# EAGLE board Inverter New_no_connec (EAGLE 9.1.2), part 1 of 2
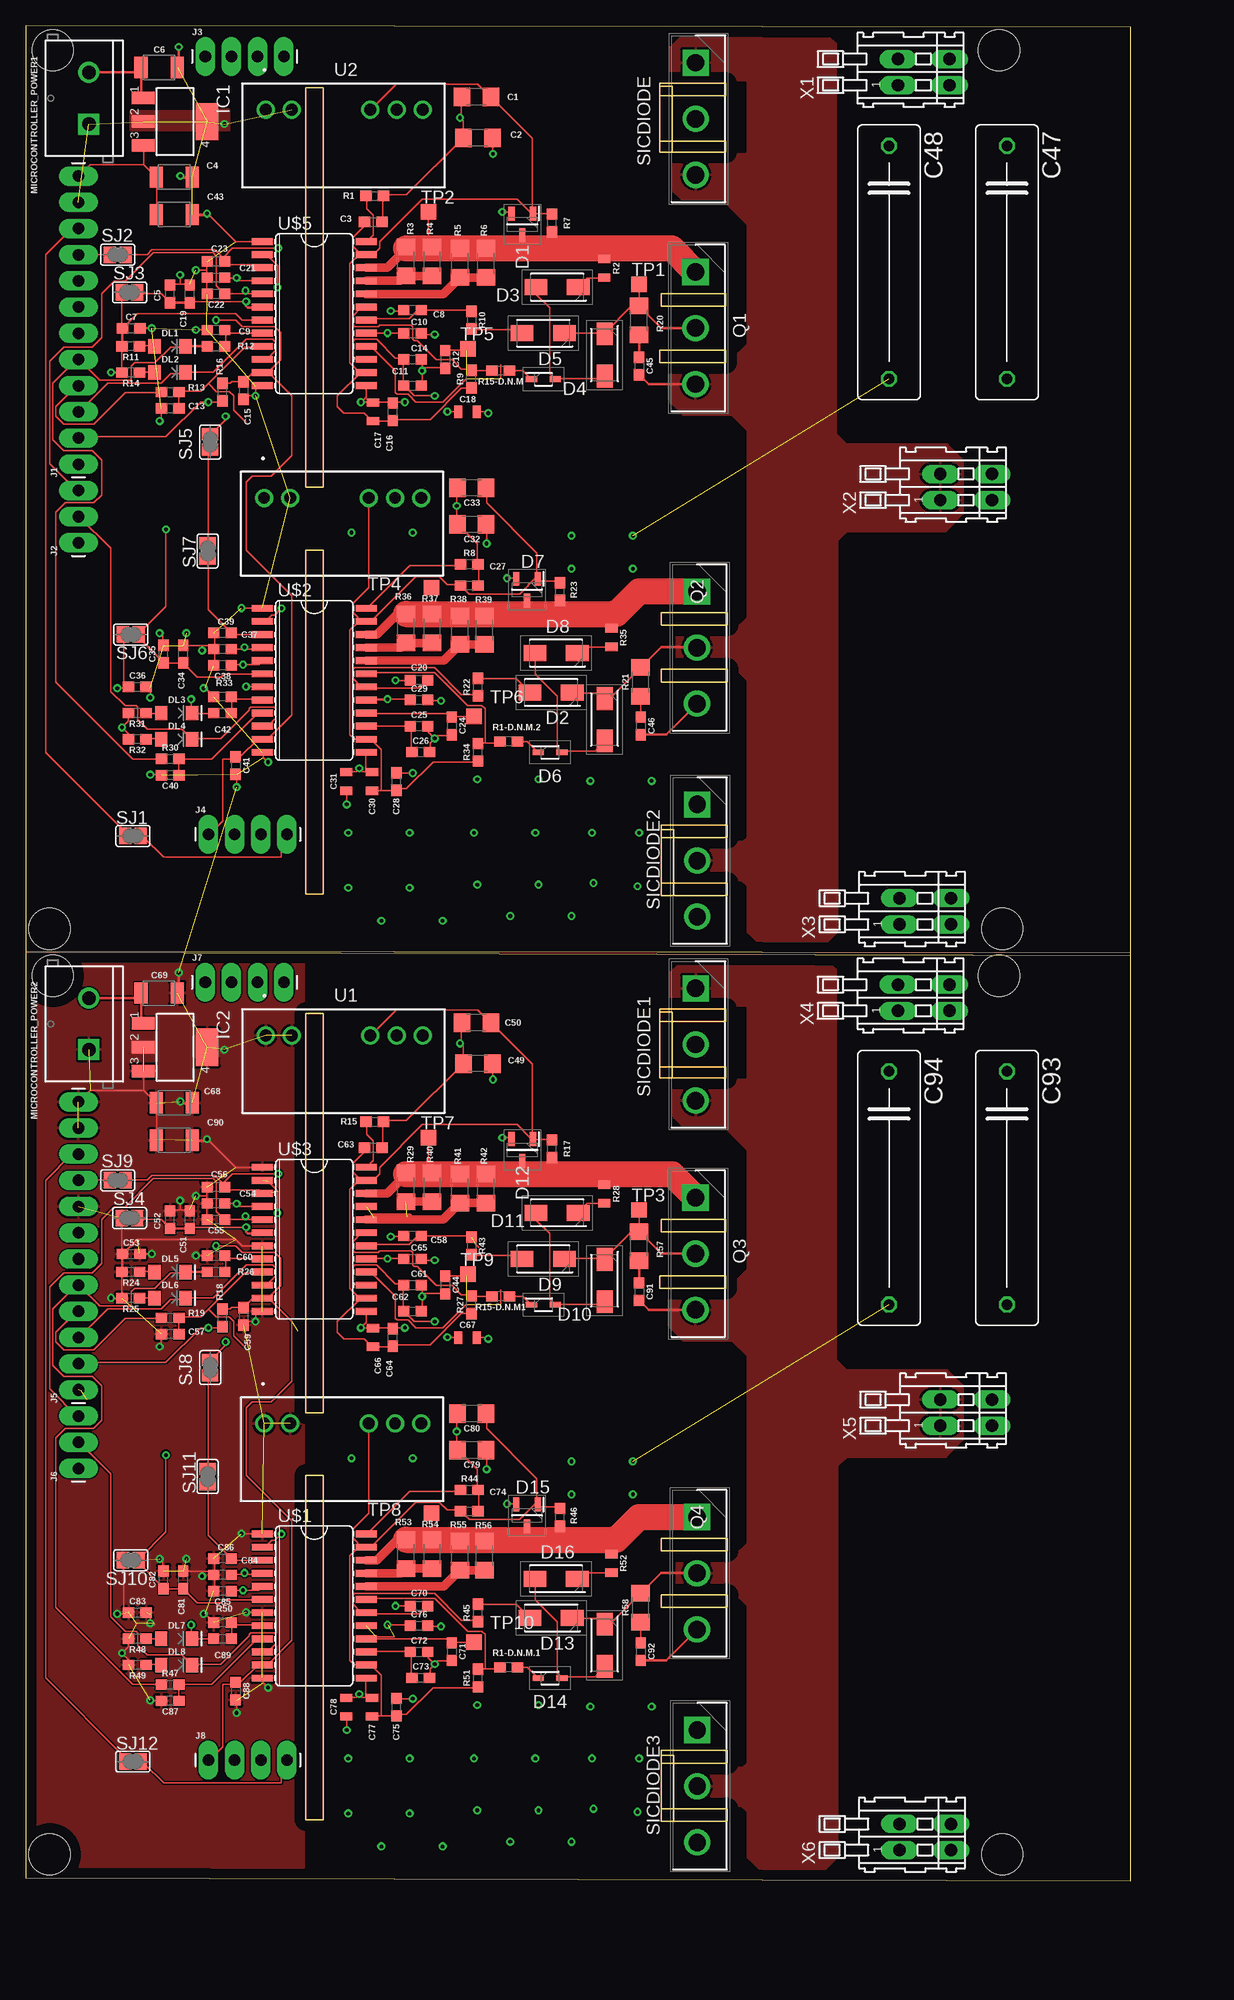
[diagram p0: board, top side]
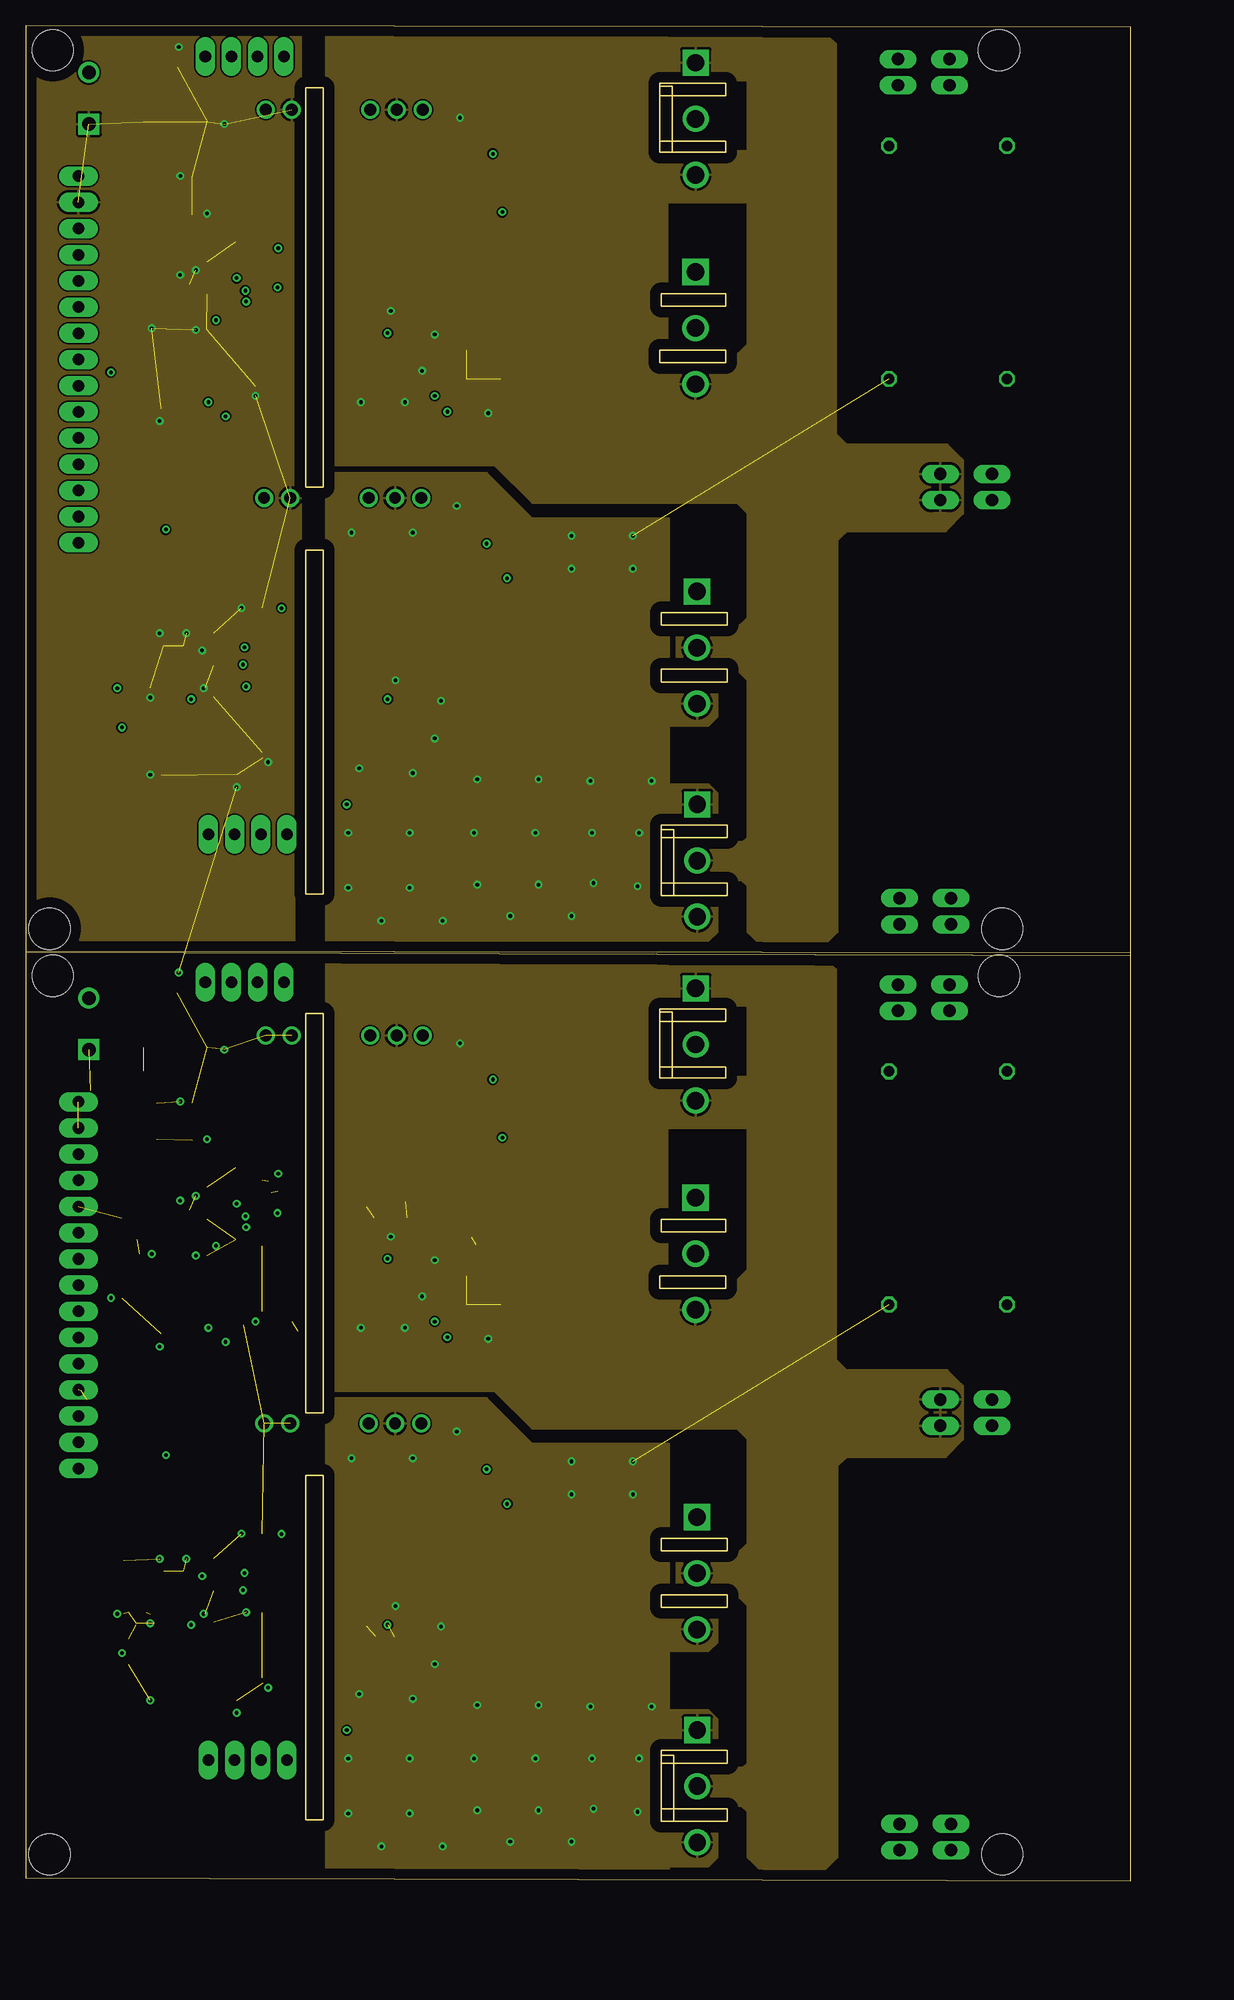
[diagram p1: board, inner layer Route2]
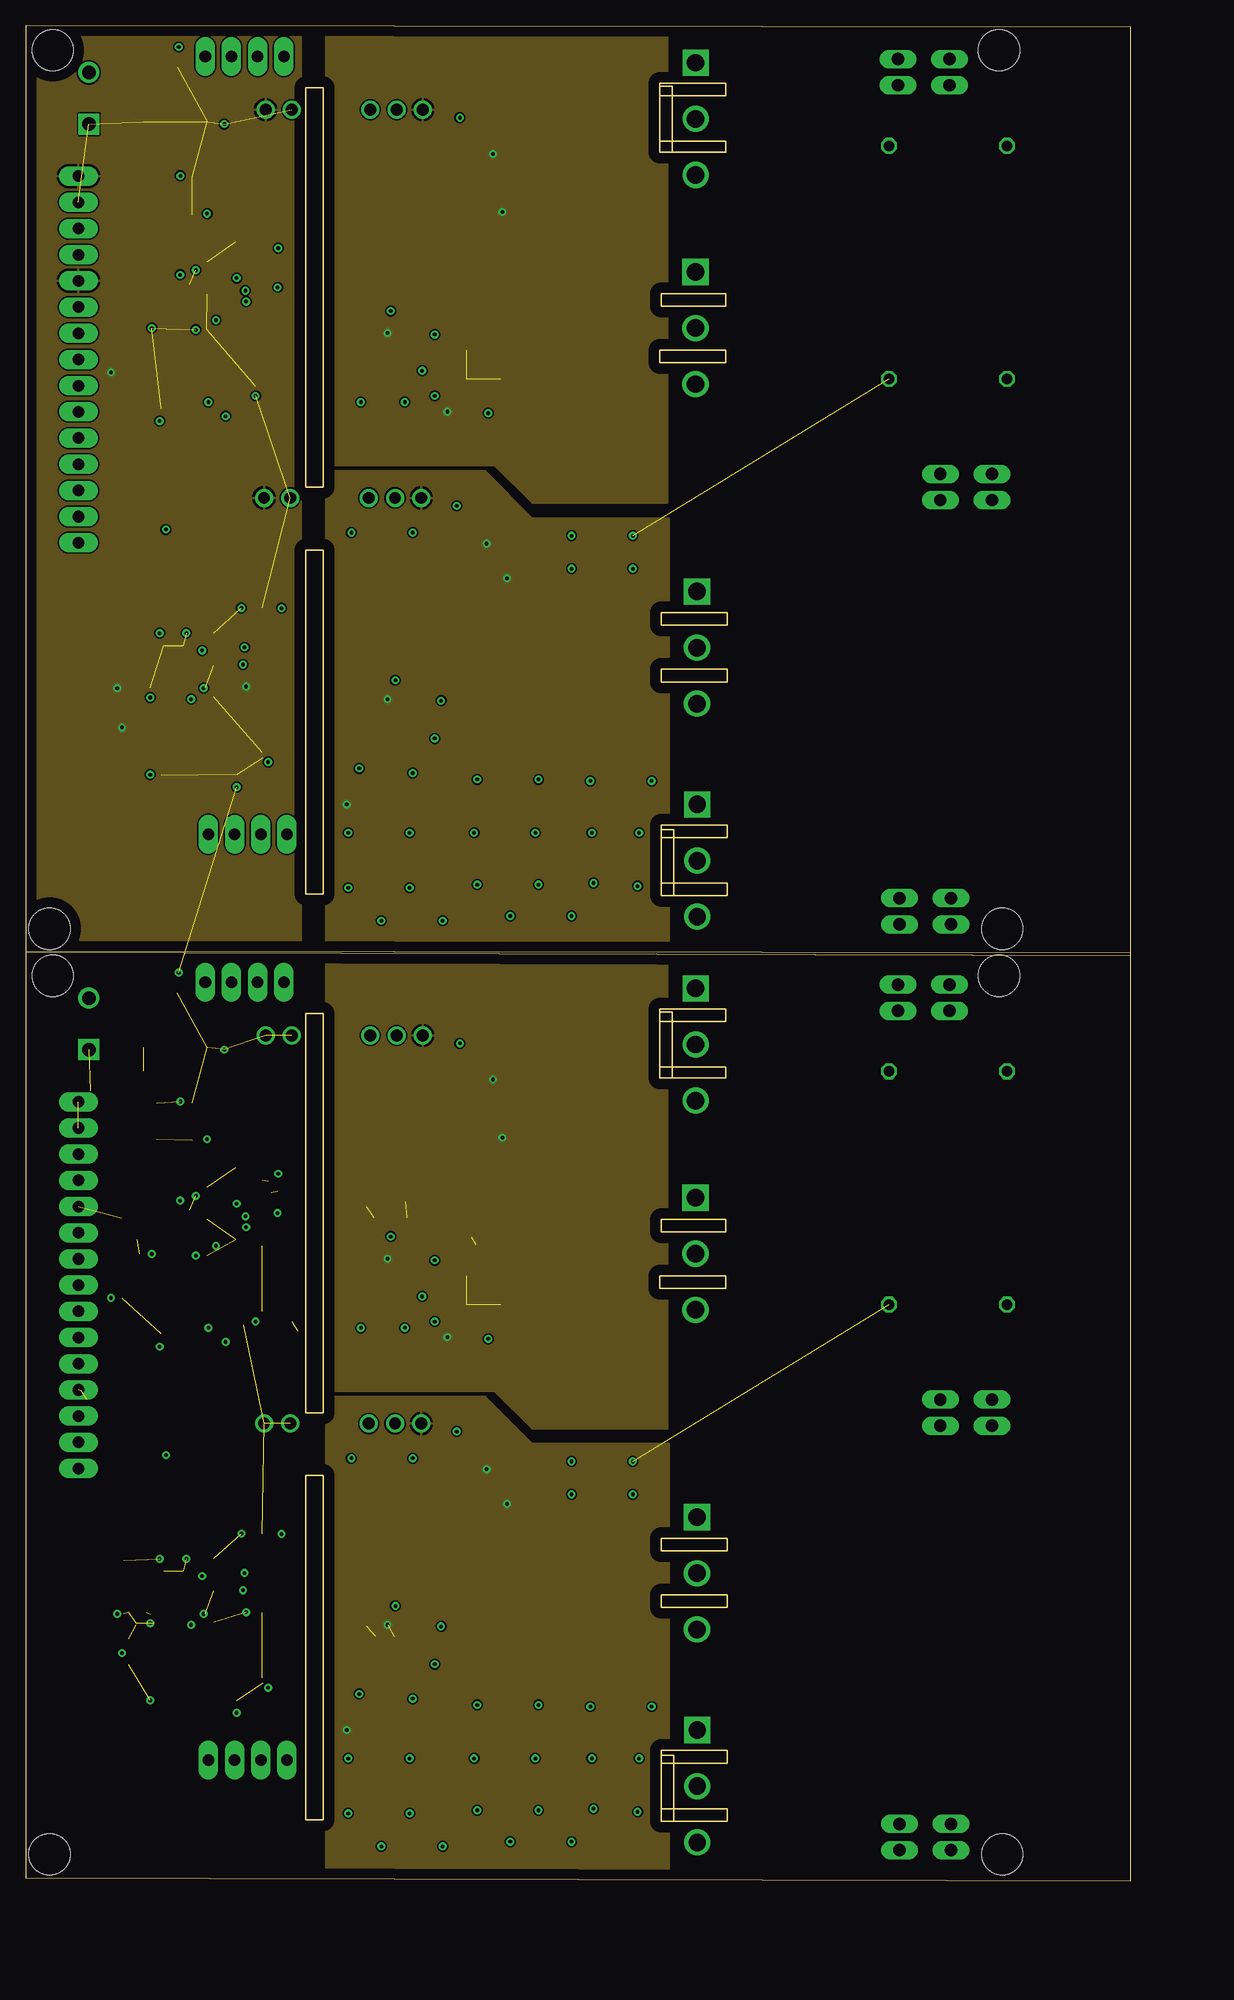
[diagram p2: board, inner layer Route15]
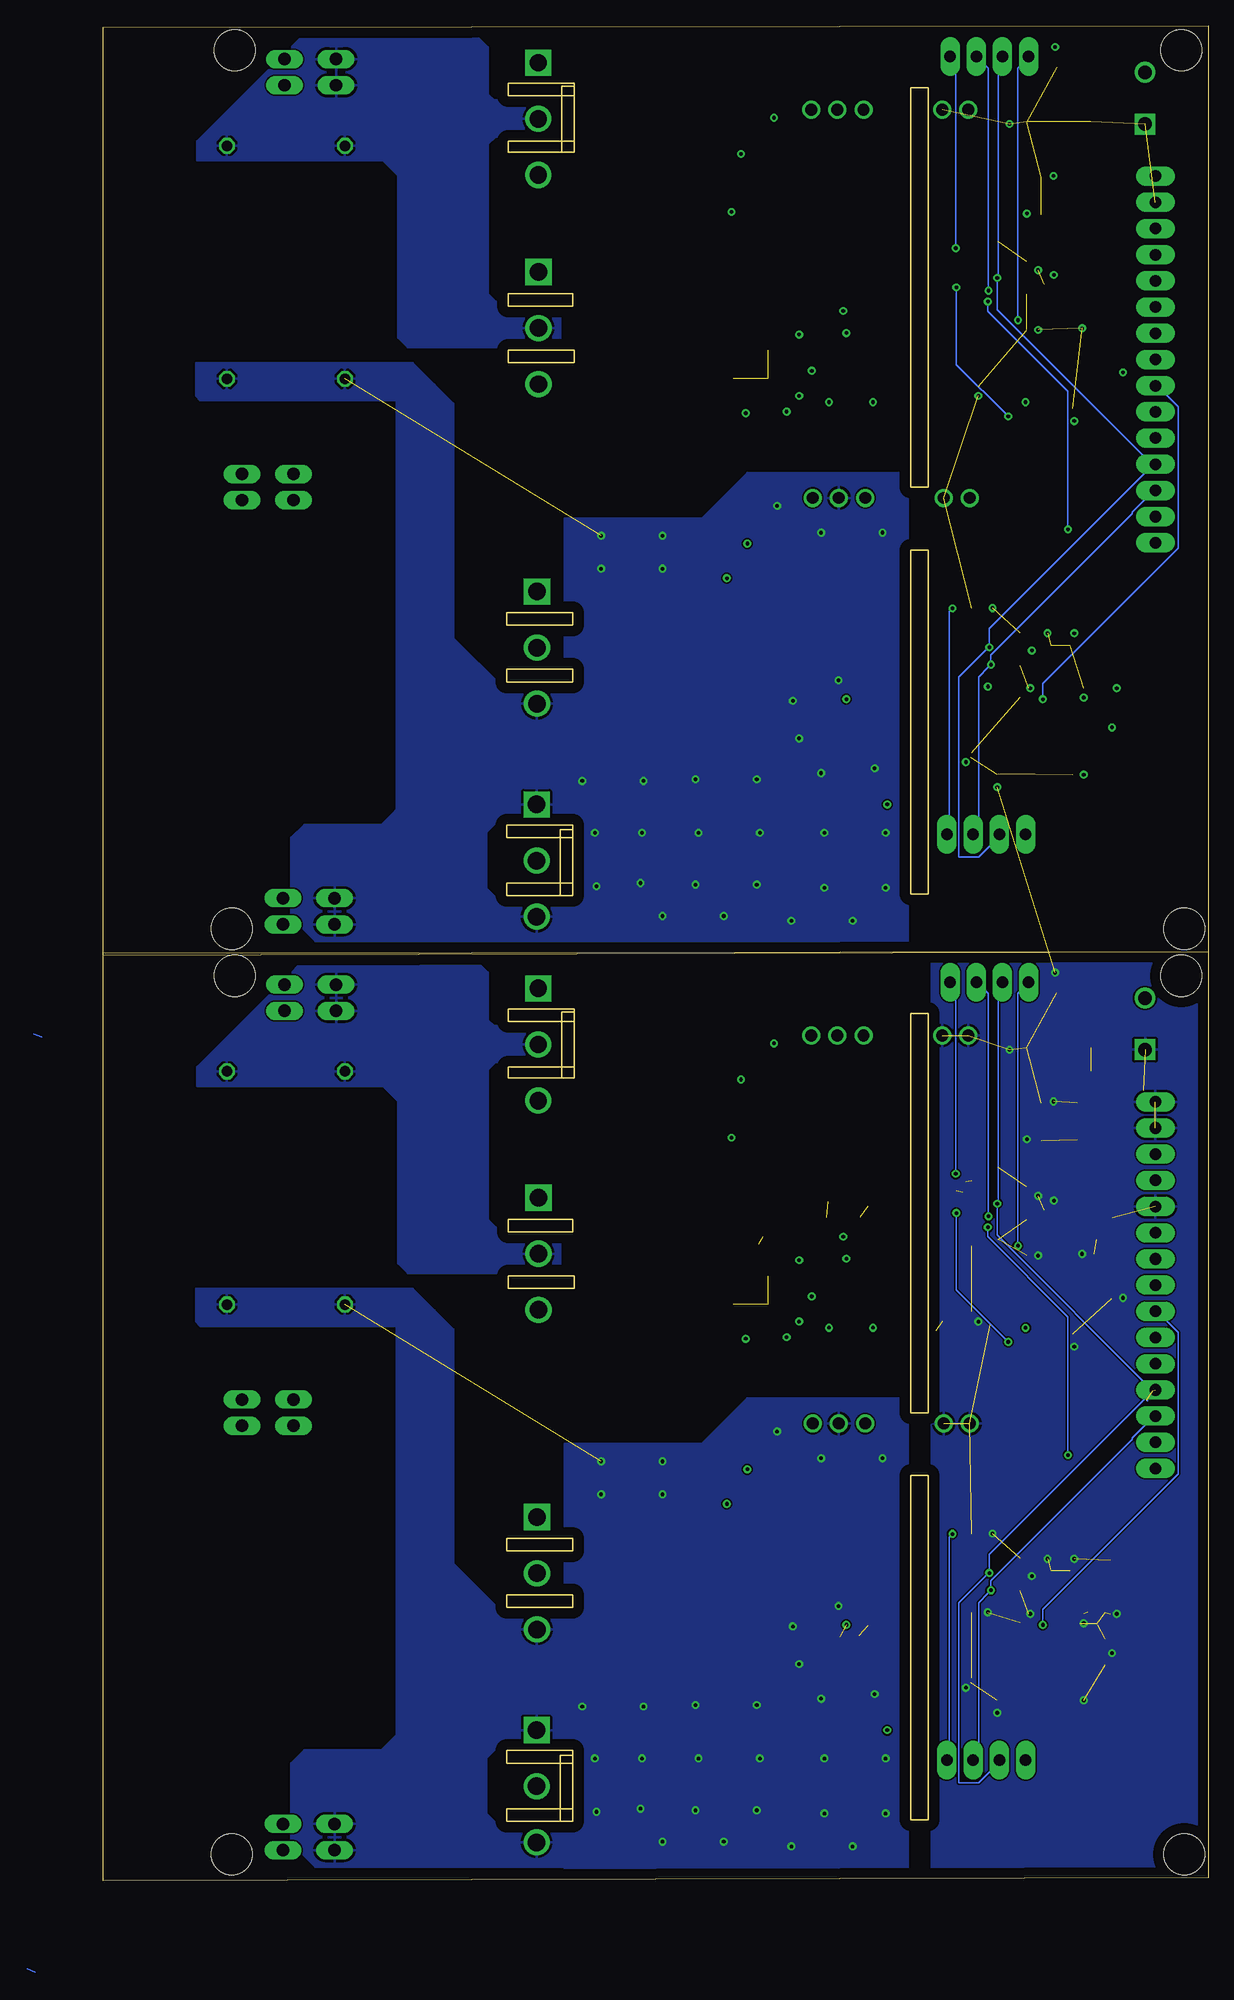
[diagram p3: board, bottom side, seen from below]

Size 107.12 x 179.91 mm. Coordinates in mm from the lower left corner, seen from the top.
Outline: 0,90.07 107.12,89.76 107.12,179.76 0,179.91 0,90.07
Outline: 0,0.3 107.12,0 107.12,89.99 0,90.14 0,0.3
Copper layers (1*2+15*16): Top 0.035mm / dielectric 1.15mm / Route2 0.035mm / dielectric 0.15mm / Route15 0.035mm / dielectric 0.2mm / Bottom 0.035mm
Design rules "default *": minimum track width 6mil, minimum drill 0.35mm, track to track 6mil, track to pad 6mil, pad to pad 6mil, via to via 6mil, smd to smd 6mil, copper to edge 40mil, drill to drill 6mil, minimum pad ring 10mil, minimum via ring 8mil, stop-mask expansion 4mil, vias tented up to drill 0mil, thermal gap 10mil
Net classes: 0 default: width 0.1 mm, drill 0.2 mm, clearance 0.003 mm
Holes 4 mm at 94.67,92.35 94.36,177.55 2.62,177.55 2.31,92.35 94.67,2.59 94.36,87.78 2.62,87.78 2.31,2.59

## Footprints (pad centres in the part's own frame; a part is rotated, then mirrored left to right if it is on the bottom)
SPARKFUN-CAPACITORS_1206 = smd 1.6 x 1.8: 1 -1.4,0; 2 1.4,0
SPARKFUN-CAPACITORS_0603 = smd 1.1 x 1: 1 -0.85,0; 2 0.85,0
SPARKFUN-CAPACITORS_1210 = smd 1.27 x 2.06: 1 -1.755,0; 2 1.755,0
SPARKFUN-CAPACITORS_0805 = smd 0.8 x 1.2: 1 -0.9,0; 2 0.9,0
C225-062X268 = drill 1.016 octagon: 1 -11.303,0; 2 11.303,0
BAT54SFILM_SOT105P242X150-3N = smd 1.35 x 0.6: 1 -1.05,1.05; 2 -1.05,-1.05; 3 1.05,0
STTH112A_DIOM5126X265N = smd 2.2 x 1.55: 1 -2.05,0; 2 2.05,0
STPS2H100A_DIOM5126X265N = smd 2.2 x 1.55: 1 -2.05,0; 2 2.05,0
BAT20JFILM_SOD2512X113N = smd 1.11 x 0.55: 1 -1.14,0; 2 1.14,0
SPARKFUN-LED_LED-1206 = smd 1.2 x 1.4: A -1.5,0; C 1.5,0
NATIONAL-SEMICONDUCTOR_SOT223 = smd 1.219 x 2.235: 1 -2.311,-3.099; 2 0,-3.099; 3 2.311,-3.099 | smd 3.6 x 2.2: 4 0,3.099
SPARKFUN-CONNECTORS_1X12_LONGPADS = drill 1.118 pad 1.88 long: 1 0,0; 2 2.54,0; 3 5.08,0; 4 7.62,0; 5 10.16,0; 6 12.7,0; 7 15.24,0; 8 17.78,0; 9 20.32,0; 10 22.86,0; 11 25.4,0; 12 27.94,0
SPARKFUN-CONNECTORS_1X03_LONGPADS = drill 1.118 pad 1.88 long: 1 0,0; 2 2.54,0; 3 5.08,0
SPARKFUN-CONNECTORS_1X04_LONGPADS = drill 1.118 pad 1.88 long: 1 0,0; 2 2.54,0; 3 5.08,0; 4 7.62,0
SPARKFUN-CONNECTORS_SCREWTERMINAL-5MM-2 = drill 1.3 pad 2.032 square: 1 0,0 | drill 1.3 pad 2.032: 2 5,0
C2M0280120D_TO544P521X1594X2550-3P = drill 1.69 pad 2.535 square: 1 0,0 | drill 1.69 pad 2.535: 2 5.44,0; 3 10.88,0
SPARKFUN-RESISTORS_0603 = smd 1.1 x 1: 1 -0.85,0; 2 0.85,0
SPARKFUN-RESISTORS_0805 = smd 0.8 x 1.2: 1 -0.9,0; 2 0.9,0
SPARKFUN-RESISTORS_1206 = smd 1.6 x 1.8: 1 -1.4,0; 2 1.4,0
JUMPER_SJ = smd 1.168 x 1.6: 1 -0.762,0; 2 0.762,0
TP15SQ = smd 1.5 x 1.5: TP 0,0
SAMACSYS_LIB_MGJ2D_7-PIN-SIP = drill 1.15 pad 1.75: 1 2.27,-2.53; 2 4.81,-2.53; 5 12.43,-2.53; 6 14.97,-2.53; 7 17.51,-2.53
SO24E-IC_SO24W = smd 0.66 x 2.032: 1 -4.445,-3.759; 2 -3.175,-3.759; 3 -1.905,-3.759; 4 -0.635,-3.759; 5 0.635,-3.759; 6 1.905,-3.759; 7 3.175,-3.759; 8 4.445,-3.759; 9 5.715,-3.759; 10 6.985,-3.759; 11 8.255,-3.759; 12 9.525,-3.759; 13 9.525,6.299; 14 8.255,6.299; 15 6.985,6.299; 16 5.715,6.299; 17 4.445,6.299; 18 3.175,6.299; 19 1.905,6.299; 20 0.635,6.299; 21 -0.635,6.299; 22 -1.905,6.299; 23 -3.175,6.299; 24 -4.445,6.299
234-502 = drill 1.2 long: A1 -1.27,2.5; A2 1.27,2.5; B1 -1.27,-2.5; B2 1.27,-2.5

## Placement (x,y rotation side)
C1  2.2uF  [SPARKFUN-CAPACITORS_1206]  43.69,173 180 top
C2  2.2uF  [SPARKFUN-CAPACITORS_1206]  43.84,169.04 180 top
C3  0.1uF  [SPARKFUN-CAPACITORS_0603]  33.68,160.88 0 top
C4  10uF  [SPARKFUN-CAPACITORS_1210]  14.4,165.23 0 top
C5  0.1uF  [SPARKFUN-CAPACITORS_0603]  14,153.9 90 top
C6  10uF  [SPARKFUN-CAPACITORS_1210]  12.93,175.87 0 top
C7  0.1uF  [SPARKFUN-CAPACITORS_0603]  10.21,150.57 0 top
C8  100pF  [SPARKFUN-CAPACITORS_0603]  37.49,152.32 180 top
C9  100pF  [SPARKFUN-CAPACITORS_0603]  18.44,150.39 180 top
C10  0.1uF  [SPARKFUN-CAPACITORS_0603]  37.49,150.09 0 top
C11  0.1uF  [SPARKFUN-CAPACITORS_0603]  37.49,145.01 0 top
C12  1nF  [SPARKFUN-CAPACITORS_0603]  40.67,147.55 270 top
C13  100pF  [SPARKFUN-CAPACITORS_0603]  14,142.8 180 top
C14  4.7uF  [SPARKFUN-CAPACITORS_0603]  37.49,147.55 0 top
C15  100pF  [SPARKFUN-CAPACITORS_0603]  21.11,144.53 270 top
C16  0.1uF  [SPARKFUN-CAPACITORS_0603]  35.59,142.47 90 top
C17  1.0uF  [SPARKFUN-CAPACITORS_0805]  33.68,142.47 90 top
C18  1.0uF  [SPARKFUN-CAPACITORS_0805]  42.82,142.47 0 top
C19  4.7uF  [SPARKFUN-CAPACITORS_0603]  15.9,153.9 90 top
C20  100pF  [SPARKFUN-CAPACITORS_0603]  38.13,116.43 180 top
C21  47pF  [SPARKFUN-CAPACITORS_0603]  18.44,155.47 180 top
C22  47pF  [SPARKFUN-CAPACITORS_0603]  18.44,153.9 180 top
C23  47pF  [SPARKFUN-CAPACITORS_0603]  18.44,157.05 180 top
C24  1nF  [SPARKFUN-CAPACITORS_0603]  41.3,112.01 270 top
C25  4.7uF  [SPARKFUN-CAPACITORS_0603]  38.13,111.99 0 top
C26  0.1uF  [SPARKFUN-CAPACITORS_0603]  38.28,109.47 0 top
C27  0.1uF  [SPARKFUN-CAPACITORS_0603]  43,125.63 0 top
C28  0.1uF  [SPARKFUN-CAPACITORS_0603]  35.94,106.63 90 top
C29  0.1uF  [SPARKFUN-CAPACITORS_0603]  38.13,114.53 0 top
C30  1.0uF  [SPARKFUN-CAPACITORS_0805]  33.58,106.63 90 top
C31  1.0uF  [SPARKFUN-CAPACITORS_0805]  31.06,106.63 90 top
C32  2.2uF  [SPARKFUN-CAPACITORS_1206]  43.23,131.55 180 top
C33  2.2uF  [SPARKFUN-CAPACITORS_1206]  43.23,135.08 180 top
C34  4.7uF  [SPARKFUN-CAPACITORS_0603]  15.27,118.97 90 top
C35  0.1uF  [SPARKFUN-CAPACITORS_0603]  13.36,118.97 90 top
C36  0.1uF  [SPARKFUN-CAPACITORS_0603]  10.82,115.8 0 top
C37  47pF  [SPARKFUN-CAPACITORS_0603]  19.08,119.46 180 top
C38  47pF  [SPARKFUN-CAPACITORS_0603]  19.08,117.88 180 top
C39  47pF  [SPARKFUN-CAPACITORS_0603]  19.08,121.03 180 top
C40  100pF  [SPARKFUN-CAPACITORS_0603]  14,107.24 180 top
C41  100pF  [SPARKFUN-CAPACITORS_0603]  20.35,108.18 270 top
C42  100pF  [SPARKFUN-CAPACITORS_0603]  19.08,114.83 180 top
C43  10uF  [SPARKFUN-CAPACITORS_1210]  14.4,161.59 0 top
C44  1nF  [SPARKFUN-CAPACITORS_0603]  40.67,57.79 270 top
C45  100pF  [SPARKFUN-CAPACITORS_0603]  59.46,146.91 270 top
C46  100pF  [SPARKFUN-CAPACITORS_0603]  59.61,112.01 270 top
C47  [C225-062X268]  95.12,156.97 270 top
C48  [C225-062X268]  83.69,156.97 270 top
C49  2.2uF  [SPARKFUN-CAPACITORS_1206]  43.84,79.27 180 top
C50  2.2uF  [SPARKFUN-CAPACITORS_1206]  43.69,83.24 180 top
C51  4.7uF  [SPARKFUN-CAPACITORS_0603]  15.9,64.14 90 top
C52  0.1uF  [SPARKFUN-CAPACITORS_0603]  14,64.14 90 top
C53  0.1uF  [SPARKFUN-CAPACITORS_0603]  10.21,60.81 0 top
C54  47pF  [SPARKFUN-CAPACITORS_0603]  18.44,65.71 180 top
C55  47pF  [SPARKFUN-CAPACITORS_0603]  18.44,64.14 180 top
C56  47pF  [SPARKFUN-CAPACITORS_0603]  18.44,67.28 180 top
C57  100pF  [SPARKFUN-CAPACITORS_0603]  14,53.04 180 top
C58  100pF  [SPARKFUN-CAPACITORS_0603]  37.49,62.56 180 top
C59  100pF  [SPARKFUN-CAPACITORS_0603]  21.11,54.76 270 top
C60  100pF  [SPARKFUN-CAPACITORS_0603]  18.44,60.63 180 top
C61  4.7uF  [SPARKFUN-CAPACITORS_0603]  37.49,57.79 0 top
C62  0.1uF  [SPARKFUN-CAPACITORS_0603]  37.49,55.25 0 top
C63  0.1uF  [SPARKFUN-CAPACITORS_0603]  33.68,71.12 0 top
C64  0.1uF  [SPARKFUN-CAPACITORS_0603]  35.59,52.71 90 top
C65  0.1uF  [SPARKFUN-CAPACITORS_0603]  37.49,60.33 0 top
C66  1.0uF  [SPARKFUN-CAPACITORS_0805]  33.68,52.71 90 top
C67  1.0uF  [SPARKFUN-CAPACITORS_0805]  42.82,52.71 0 top
C68  10uF  [SPARKFUN-CAPACITORS_1210]  14.4,75.46 0 top
C69  10uF  [SPARKFUN-CAPACITORS_1210]  12.93,86.11 0 top
C70  100pF  [SPARKFUN-CAPACITORS_0603]  38.13,26.67 180 top
C71  1nF  [SPARKFUN-CAPACITORS_0603]  41.3,22.25 270 top
C72  4.7uF  [SPARKFUN-CAPACITORS_0603]  38.13,22.23 0 top
C73  0.1uF  [SPARKFUN-CAPACITORS_0603]  38.28,19.71 0 top
C74  0.1uF  [SPARKFUN-CAPACITORS_0603]  43,35.86 0 top
C75  0.1uF  [SPARKFUN-CAPACITORS_0603]  35.94,16.87 90 top
C76  0.1uF  [SPARKFUN-CAPACITORS_0603]  38.13,24.77 0 top
C77  1.0uF  [SPARKFUN-CAPACITORS_0805]  33.58,16.87 90 top
C78  1.0uF  [SPARKFUN-CAPACITORS_0805]  31.06,16.87 90 top
C79  2.2uF  [SPARKFUN-CAPACITORS_1206]  43.23,41.78 180 top
C80  2.2uF  [SPARKFUN-CAPACITORS_1206]  43.23,45.31 180 top
C81  4.7uF  [SPARKFUN-CAPACITORS_0603]  15.27,29.21 90 top
C82  0.1uF  [SPARKFUN-CAPACITORS_0603]  13.36,29.21 90 top
C83  0.1uF  [SPARKFUN-CAPACITORS_0603]  10.82,26.04 0 top
C84  47pF  [SPARKFUN-CAPACITORS_0603]  19.08,29.69 180 top
C85  47pF  [SPARKFUN-CAPACITORS_0603]  19.08,28.12 180 top
C86  47pF  [SPARKFUN-CAPACITORS_0603]  19.08,31.27 180 top
C87  100pF  [SPARKFUN-CAPACITORS_0603]  14,17.48 180 top
C88  100pF  [SPARKFUN-CAPACITORS_0603]  20.35,18.42 270 top
C89  100pF  [SPARKFUN-CAPACITORS_0603]  19.08,25.07 180 top
C90  10uF  [SPARKFUN-CAPACITORS_1210]  14.4,71.83 0 top
C91  100pF  [SPARKFUN-CAPACITORS_0603]  59.46,57.15 270 top
C92  100pF  [SPARKFUN-CAPACITORS_0603]  59.61,22.25 270 top
C93  [C225-062X268]  95.12,67.21 270 top
C94  [C225-062X268]  83.69,67.21 270 top
D1  BAT54SFILM_BAT54SFILM  [BAT54SFILM_SOT105P242X150-3N]  48.13,160.66 270 top
D2  STTH112A_STTH112A  [STTH112A_DIOM5126X265N]  50.93,115.27 180 top
D3  STPS2H100A_STPS2H100A  [STPS2H100A_DIOM5126X265N]  51.51,154.56 180 top
D4  BAT20JFILM_BAT20JFILM  [BAT20JFILM_SOD2512X113N]  50.19,145.64 0 top
D5  STTH112A_STTH112A  [STTH112A_DIOM5126X265N]  50.16,150.09 180 top
D6  BAT20JFILM_BAT20JFILM  [BAT20JFILM_SOD2512X113N]  50.83,109.45 0 top
D7  BAT54SFILM_BAT54SFILM  [BAT54SFILM_SOT105P242X150-3N]  48.59,125.22 270 top
D8  STPS2H100A_STPS2H100A  [STPS2H100A_DIOM5126X265N]  51.41,119.08 180 top
D9  STTH112A_STTH112A  [STTH112A_DIOM5126X265N]  50.16,60.33 180 top
D9-D.N.M  STPS2H100A_STPS2H100A  [STPS2H100A_DIOM5126X265N]  56.11,147.98 270 top
D9-D.N.M1  STPS2H100A_STPS2H100A  [STPS2H100A_DIOM5126X265N]  56.11,58.22 270 top
D9-D.N.M.1  STPS2H100A_STPS2H100A  [STPS2H100A_DIOM5126X265N]  56.11,22.86 270 top
D9-D.N.M.2  STPS2H100A_STPS2H100A  [STPS2H100A_DIOM5126X265N]  56.11,112.62 270 top
D10  BAT20JFILM_BAT20JFILM  [BAT20JFILM_SOD2512X113N]  50.19,55.88 0 top
D11  STPS2H100A_STPS2H100A  [STPS2H100A_DIOM5126X265N]  51.51,64.8 180 top
D12  BAT54SFILM_BAT54SFILM  [BAT54SFILM_SOT105P242X150-3N]  48.13,70.89 270 top
D13  STTH112A_STTH112A  [STTH112A_DIOM5126X265N]  50.93,25.5 180 top
D14  BAT20JFILM_BAT20JFILM  [BAT20JFILM_SOD2512X113N]  50.83,19.69 0 top
D15  BAT54SFILM_BAT54SFILM  [BAT54SFILM_SOT105P242X150-3N]  48.59,35.46 270 top
D16  STPS2H100A_STPS2H100A  [STPS2H100A_DIOM5126X265N]  51.41,29.31 180 top
DL1  RED  [SPARKFUN-LED_LED-1206]  14,148.82 0 top
DL2  RED  [SPARKFUN-LED_LED-1206]  14,146.28 0 top
DL3  RED  [SPARKFUN-LED_LED-1206]  14.63,113.26 0 top
DL4  RED  [SPARKFUN-LED_LED-1206]  14.63,110.72 0 top
DL5  RED  [SPARKFUN-LED_LED-1206]  14,59.06 0 top
DL6  RED  [SPARKFUN-LED_LED-1206]  14,56.52 0 top
DL7  RED  [SPARKFUN-LED_LED-1206]  14.63,23.5 0 top
DL8  RED  [SPARKFUN-LED_LED-1206]  14.63,20.96 0 top
IC1  NATIONAL-SEMICONDUCTOR_LM2936MP-3.0  [NATIONAL-SEMICONDUCTOR_SOT223]  14.48,170.61 270 top
IC2  NATIONAL-SEMICONDUCTOR_LM2936MP-3.0  [NATIONAL-SEMICONDUCTOR_SOT223]  14.48,80.85 270 top
J1  [SPARKFUN-CONNECTORS_1X12_LONGPADS]  5.11,137.39 90 top
J2  [SPARKFUN-CONNECTORS_1X03_LONGPADS]  5.11,129.77 90 top
J3  [SPARKFUN-CONNECTORS_1X04_LONGPADS]  17.4,176.94 0 top
J4  [SPARKFUN-CONNECTORS_1X04_LONGPADS]  17.7,101.5 0 top
J5  [SPARKFUN-CONNECTORS_1X12_LONGPADS]  5.11,47.62 90 top
J6  [SPARKFUN-CONNECTORS_1X03_LONGPADS]  5.11,40.01 90 top
J7  [SPARKFUN-CONNECTORS_1X04_LONGPADS]  17.4,87.17 0 top
J8  [SPARKFUN-CONNECTORS_1X04_LONGPADS]  17.7,11.73 0 top
MICROCONTROLLER_POWER1  [SPARKFUN-CONNECTORS_SCREWTERMINAL-5MM-2]  6.12,170.38 90 top
MICROCONTROLLER_POWER2  [SPARKFUN-CONNECTORS_SCREWTERMINAL-5MM-2]  6.12,80.62 90 top
Q1  C2M0280120D_C2M0280120D  [C2M0280120D_TO544P521X1594X2550-3P]  64.92,156.03 270 top
Q2  C2M0280120D_C2M0280120D  [C2M0280120D_TO544P521X1594X2550-3P]  65.07,125.04 270 top
Q3  C2M0280120D_C2M0280120D  [C2M0280120D_TO544P521X1594X2550-3P]  64.92,66.27 270 top
Q4  C2M0280120D_C2M0280120D  [C2M0280120D_TO544P521X1594X2550-3P]  65.07,35.28 270 top
R1  1k  [SPARKFUN-RESISTORS_0603]  33.83,163.4 0 top
R1-D.N.M.1  0  [SPARKFUN-RESISTORS_0603]  46.81,20.73 180 top
R1-D.N.M.2  0  [SPARKFUN-RESISTORS_0603]  46.81,110.49 180 top
R2  [SPARKFUN-RESISTORS_0805]  56.08,156.39 270 top
R3  [SPARKFUN-RESISTORS_1206]  36.86,157.05 90 top
R4  [SPARKFUN-RESISTORS_1206]  39.4,157.05 90 top
R5  [SPARKFUN-RESISTORS_1206]  42.09,156.9 90 top
R6  [SPARKFUN-RESISTORS_1206]  44.63,156.9 90 top
R7  47k  [SPARKFUN-RESISTORS_0603]  51.03,160.78 90 top
R8  1k  [SPARKFUN-RESISTORS_0603]  43,127.69 0 top
R9  0  [SPARKFUN-RESISTORS_0603]  43.21,145.64 90 top
R10  1k  [SPARKFUN-RESISTORS_0603]  43.21,151.36 270 top
R11  [SPARKFUN-RESISTORS_0603]  10.19,148.82 180 top
R12  100  [SPARKFUN-RESISTORS_0603]  18.44,148.82 0 top
R13  100  [SPARKFUN-RESISTORS_0603]  14,144.37 0 top
R14  [SPARKFUN-RESISTORS_0603]  10.19,146.28 180 top
R15  1k  [SPARKFUN-RESISTORS_0603]  33.83,73.63 0 top
R15-D.N.M  0  [SPARKFUN-RESISTORS_0603]  46.05,146.46 180 top
R15-D.N.M1  0  [SPARKFUN-RESISTORS_0603]  46.05,56.69 180 top
R16  100  [SPARKFUN-RESISTORS_0603]  19.08,144.37 90 top
R17  47k  [SPARKFUN-RESISTORS_0603]  51.03,71.02 90 top
R18  100  [SPARKFUN-RESISTORS_0603]  19.08,54.61 90 top
R19  100  [SPARKFUN-RESISTORS_0603]  14,54.61 0 top
R20  [SPARKFUN-RESISTORS_1206]  59.46,151.33 90 top
R21  [SPARKFUN-RESISTORS_1206]  59.61,116.28 90 top
R22  1k  [SPARKFUN-RESISTORS_0603]  43.84,115.77 90 top
R23  47k  [SPARKFUN-RESISTORS_0603]  51.79,125.04 90 top
R24  [SPARKFUN-RESISTORS_0603]  10.19,59.06 180 top
R25  [SPARKFUN-RESISTORS_0603]  10.19,56.52 180 top
R26  100  [SPARKFUN-RESISTORS_0603]  18.44,59.06 0 top
R27  0  [SPARKFUN-RESISTORS_0603]  43.21,55.88 90 top
R28  [SPARKFUN-RESISTORS_0805]  56.08,66.62 270 top
R29  [SPARKFUN-RESISTORS_1206]  36.86,67.28 90 top
R30  100  [SPARKFUN-RESISTORS_0603]  14,108.81 0 top
R31  [SPARKFUN-RESISTORS_0603]  10.82,113.26 180 top
R32  [SPARKFUN-RESISTORS_0603]  10.82,110.72 180 top
R33  100  [SPARKFUN-RESISTORS_0603]  19.08,113.26 0 top
R34  0  [SPARKFUN-RESISTORS_0603]  43.84,109.45 90 top
R35  [SPARKFUN-RESISTORS_0805]  56.77,120.57 270 top
R36  [SPARKFUN-RESISTORS_1206]  36.86,121.46 90 top
R37  [SPARKFUN-RESISTORS_1206]  39.4,121.46 90 top
R38  [SPARKFUN-RESISTORS_1206]  42.09,121.31 90 top
R39  [SPARKFUN-RESISTORS_1206]  44.48,121.31 90 top
R40  [SPARKFUN-RESISTORS_1206]  39.4,67.28 90 top
R41  [SPARKFUN-RESISTORS_1206]  42.09,67.13 90 top
R42  [SPARKFUN-RESISTORS_1206]  44.63,67.13 90 top
R43  1k  [SPARKFUN-RESISTORS_0603]  43.21,61.59 270 top
R44  1k  [SPARKFUN-RESISTORS_0603]  43,37.92 0 top
R45  1k  [SPARKFUN-RESISTORS_0603]  43.84,26.01 90 top
R46  47k  [SPARKFUN-RESISTORS_0603]  51.79,35.28 90 top
R47  100  [SPARKFUN-RESISTORS_0603]  14,19.05 0 top
R48  [SPARKFUN-RESISTORS_0603]  10.82,23.5 180 top
R49  [SPARKFUN-RESISTORS_0603]  10.82,20.96 180 top
R50  100  [SPARKFUN-RESISTORS_0603]  19.08,23.5 0 top
R51  0  [SPARKFUN-RESISTORS_0603]  43.84,19.69 90 top
R52  [SPARKFUN-RESISTORS_0805]  56.77,30.81 270 top
R53  [SPARKFUN-RESISTORS_1206]  36.86,31.7 90 top
R54  [SPARKFUN-RESISTORS_1206]  39.4,31.7 90 top
R55  [SPARKFUN-RESISTORS_1206]  42.09,31.55 90 top
R56  [SPARKFUN-RESISTORS_1206]  44.48,31.55 90 top
R57  [SPARKFUN-RESISTORS_1206]  59.46,61.57 90 top
R58  [SPARKFUN-RESISTORS_1206]  59.61,26.52 90 top
SICDIODE  C2M0280120D_C2M0280120D  [C2M0280120D_TO544P521X1594X2550-3P]  64.95,176.33 270 top
SICDIODE1  C2M0280120D_C2M0280120D  [C2M0280120D_TO544P521X1594X2550-3P]  64.95,86.56 270 top
SICDIODE2  C2M0280120D_C2M0280120D  [C2M0280120D_TO544P521X1594X2550-3P]  65.1,104.39 270 top
SICDIODE3  C2M0280120D_C2M0280120D  [C2M0280120D_TO544P521X1594X2550-3P]  65.1,14.63 270 top
SJ1  [JUMPER_SJ]  10.39,101.35 0 top
SJ2  [JUMPER_SJ]  8.92,157.71 180 top
SJ3  [JUMPER_SJ]  10.06,154.05 180 top
SJ4  [JUMPER_SJ]  10.06,64.29 180 top
SJ5  [JUMPER_SJ]  17.88,139.55 270 top
SJ6  [JUMPER_SJ]  10.19,120.88 180 top
SJ7  [JUMPER_SJ]  17.63,128.98 90 top
SJ8  [JUMPER_SJ]  17.88,49.78 270 top
SJ9  [JUMPER_SJ]  8.92,67.95 180 top
SJ10  [JUMPER_SJ]  10.19,31.12 180 top
SJ11  [JUMPER_SJ]  17.63,39.22 90 top
SJ12  [JUMPER_SJ]  10.39,11.58 0 top
TP1  TPTP15SQ  [TP15SQ]  59.46,154.84 0 top
TP2  TPTP15SQ  [TP15SQ]  39.04,161.85 0 top
TP3  TPTP15SQ  [TP15SQ]  59.46,65.07 0 top
TP4  TPTP15SQ  [TP15SQ]  39.34,125.43 0 top
TP5  TPTP15SQ  [TP15SQ]  42.85,148.59 0 top
TP6  TPTP15SQ  [TP15SQ]  43.46,112.93 0 top
TP7  TPTP15SQ  [TP15SQ]  39.04,72.09 0 top
TP8  TPTP15SQ  [TP15SQ]  39.34,35.66 0 top
TP9  TPTP15SQ  [TP15SQ]  42.85,58.83 0 top
TP10  TPTP15SQ  [TP15SQ]  43.46,23.16 0 top
U1  SAMACSYS_LIB_MGJ2D052005SC  [SAMACSYS_LIB_MGJ2D_7-PIN-SIP]  20.98,84.53 0 top
U2  SAMACSYS_LIB_MGJ2D052005SC  [SAMACSYS_LIB_MGJ2D_7-PIN-SIP]  20.98,174.29 0 top
U3  SAMACSYS_LIB_MGJ2D052005SC  [SAMACSYS_LIB_MGJ2D_7-PIN-SIP]  20.83,136.65 0 top
U4  SAMACSYS_LIB_MGJ2D052005SC  [SAMACSYS_LIB_MGJ2D_7-PIN-SIP]  20.83,46.89 0 top
U$1  SO24E-IC_STGAP1AS  [SO24E-IC_SO24W]  26.7,29.21 270 top
U$2  SO24E-IC_STGAP1AS  [SO24E-IC_SO24W]  26.7,118.97 270 top
U$3  SO24E-IC_STGAP1AS  [SO24E-IC_SO24W]  26.7,64.77 270 top
U$5  SO24E-IC_STGAP1AS  [SO24E-IC_SO24W]  26.7,154.53 270 top
X1  [234-502]  87.05,175.41 90 top
X2  [234-502]  91.16,135.18 90 top
X3  [234-502]  87.2,94.03 90 top
X4  [234-502]  87.05,85.65 90 top
X5  [234-502]  91.16,45.42 90 top
X6  [234-502]  87.2,4.27 90 top

## Library data of the parts
C1 C2 C33 C49 C50 C80 = PCB_Design_board_compiled_ Four layer2; PROD_ID: CAP-10009
C3 C5 C7 C10 C11 C16 C26-C29 C35 C36 C52 C53 C62-C65 C73-C76 C82 C83 = PCB_Design_board_compiled_ Four layer2; PROD_ID: CAP-08390
C4 C6 C43 C68 C69 C90 = PCB_Design_board_compiled_ Four layer2; PROD_ID: CAP-09824
C8 C9 C13 C15 C20 C40-C42 C45 C46 C57-C60 C70 C87-C89 C91 C92 = PCB_Design_board_compiled_ Four layer2; PROD_ID: CAP-07883
C12 C24 C44 C71 = PCB_Design_board_compiled_ Four layer2; PROD_ID: CAP-07886
C14 C19 C25 C34 C51 C61 C72 C81 = PCB_Design_board_compiled_ Four layer2; PROD_ID: CAP-08280
C17 C18 C30 C31 C66 C67 C77 C78 = PCB_Design_board_compiled_ Four layer2; PROD_ID: CAP-08064
C21-C23 C37-C39 C54-C56 C84-C86 = PCB_Design_board_compiled_ Four layer2; PROD_ID: CAP-08913
C32 C79 = PCB_Design_board_compiled_ Four layer2; PROD_ID: CAP-10009; SPICEPREFIX: C
C47 C48 C93 C94 = rcl; SPICEPREFIX: C
D1 D12 = PCB_Design_board_compiled_ Four layer2; ALLIED_NUMBER: 70389803; DESCRIPTION: BAT54SFILM, Schottky Diode, 0.3A max, 40V 5ns Dual, 3-Pin, SOT-23; HEIGHT: 1.5mm; MANUFACTURER_NAME: STMicroelectronics; MANUFACTURER_PART_NUMBER: BAT54SFILM; RS_PART_NUMBER: 7146863P
D2 D5 D9 D13 = PCB_Design_board_compiled_ Four layer2; ALLIED_NUMBER: 70391556; DESCRIPTION: STTH112A, Fast Rectifier Diode, Switching 1A max, 1200V 75ns, 2-Pin, SMA; HEIGHT: 2.65mm; MANUFACTURER_NAME: STMicroelectronics; MANUFACTURER_PART_NUMBER: STTH112A; RS_PART_NUMBER: 0249319
D3 D9-D.N.M D9-D.N.M1 D11 = PCB_Design_board_compiled_ Four layer2; ALLIED_NUMBER: 70391466; DESCRIPTION: STPS2H100A, Schottky Diode, 2A max, 100V, 2-Pin, SMA; HEIGHT: 2.65mm; MANUFACTURER_NAME: STMicroelectronics; MANUFACTURER_PART_NUMBER: STPS2H100A; RS_PART_NUMBER: 0249612P
D4 D6 D10 D14 = PCB_Design_board_compiled_ Four layer2; ALLIED_NUMBER: 70389788; DESCRIPTION: BAT20JFILM, Schottky Diode, 1A max, 23V, 2-Pin, SOD-323; HEIGHT: 1.13mm; MANUFACTURER_NAME: STMicroelectronics; MANUFACTURER_PART_NUMBER: BAT20JFILM; RS_PART_NUMBER: 1657545
D7 D15 = PCB_Design_board_compiled_ Four layer2; ALLIED_NUMBER: 70389803; DESCRIPTION: BAT54SFILM, Schottky Diode, 0.3A max, 40V 5ns Dual, 3-Pin, SOT-23; HEIGHT: 1.5mm; MANUFACTURER_NAME: STMicroelectronics; MANUFACTURER_PART_NUMBER: BAT54SFILM; RS_PART_NUMBER: 7146863P; SPICEPREFIX: J
D8 D9-D.N.M.1 D9-D.N.M.2 D16 = PCB_Design_board_compiled_ Four layer2; ALLIED_NUMBER: 70391466; DESCRIPTION: STPS2H100A, Schottky Diode, 2A max, 100V, 2-Pin, SMA; HEIGHT: 2.65mm; MANUFACTURER_NAME: STMicroelectronics; MANUFACTURER_PART_NUMBER: STPS2H100A; RS_PART_NUMBER: 0249612P; SPICEPREFIX: D
DL1-DL8 = PCB_Design_board_compiled_ Four layer2; PROD_ID: DIO-09912
IC1 IC2 = PCB_Design_board_compiled_ Four layer2; MF: NATIONAL SEMICONDUCTOR; MPN: LM2936MP-3.0/NOPB; OC_FARNELL: 1496125; OC_NEWARK: 41K4522
J1 J2 J5 J6 R2-R6 R11 R14 R20 R21 R24 R25 R28 R29 R31 R32 R35-R42 R48 R49 R52-R58 SJ1-SJ12 U$1-U$3 U$5 = PCB_Design_board_compiled_ Four layer2
J3 J4 J7 J8 = PCB_Design_board_compiled_ Four layer2; PROD_ID: CONN-09696
MICROCONTROLLER_POWER1 MICROCONTROLLER_POWER2 = PCB_Design_board_compiled_ Four layer2; SF_SKU: PRT-08432
Q1-Q4 SICDIODE SICDIODE1-SICDIODE3 = PCB_Design_board_compiled_ Four layer2; DESCRIPTION: N-chan SiC MOSFET 1200V 10A TO247; HEIGHT: 5.21mm; MANUFACTURER_NAME: Wolfspeed; MANUFACTURER_PART_NUMBER: C2M0280120D; RS_PART_NUMBER: 9158820P
R1 R8 R10 R15 R22 R43-R45 = PCB_Design_board_compiled_ Four layer2; PROD_ID: RES-07856
R1-D.N.M.1 R1-D.N.M.2 R9 R15-D.N.M R15-D.N.M1 R27 R34 R51 = PCB_Design_board_compiled_ Four layer2; PROD_ID: RES-08609
R7 R17 R23 R46 = PCB_Design_board_compiled_ Four layer2; PROD_ID: RES-07871
R12 R13 R16 R18 R19 R26 R30 R33 R47 R50 = PCB_Design_board_compiled_ Four layer2; PROD_ID: RES-12438
TP1-TP10 = testpad
U1-U4 = PCB_Design_board_compiled_ Four layer2; ARROW_PART_NUMBER: MGJ2D052005SC; DESCRIPTION: Murata Power Solutions 2W Isolated DC-DC Converter, Vin 4.5 5.5 V, Vout 20 V, -5 V, I/O isolation 5200V dc; HEIGHT: mm; MANUFACTURER_NAME: Murata Electronics; MANUFACTURER_PART_NUMBER: MGJ2D052005SC; RS_PART_NUMBER: 8163506P
X1-X6 = con-wago255; MPN: 234-502; OC_FARNELL: 1777106; OC_NEWARK: 28K9105

## Nets
/DIAG1: DL2.C J1.3 U$5.10
/DIAG2: DL6.C J5.3 U$3.10
/DIAG3: DL8.C J6.2 U$1.10
/DIAG12: DL4.C J2.2 U$2.10
CK: C22.1 C38.1 J2.3 J3.3 J4.3 U$2.5 U$5.5
CK1: C55.1 C85.1 J6.3 J7.3 J8.3 U$1.5 U$3.5
CS: C21.1 C37.1 J1.1 J3.2 J4.2 U$2.4 U$5.4
CS1: C54.1 C84.1 J5.1 J7.2 J8.2 U$1.4 U$3.4
DESAT: C8.1 R10.1 U$5.18
DESAT1: C58.1 R43.1 U$3.18
DESAT2: C20.1 R22.1 U$2.18
DESAT3: C70.1 R45.1 U$1.18
GND_SIG: C1.2 C2.2 C3.2 C8.2 C10.2 C11.2 C12.2 C14.2 C16.2 C17.2 C18.2 C45.2 D2.1 D9-D.N.M.2.1 Q1.3 Q2.2 R1.2 R21.2 SICDIODE2.2 SICDIODE.1 SICDIODE.3 U2.6 U$5.13 X2.A1 X2.A2
GND_SIG1: C44.2 C49.2 C50.2 C58.2 C61.2 C62.2 C63.2 C64.2 C65.2 C66.2 C67.2 C91.2 D9-D.N.M.1.1 D13.1 Q3.3 Q4.2 R15.2 R58.2 SICDIODE1.1 SICDIODE1.3 SICDIODE3.2 U1.6 U$3.13 X5.A1 X5.A2
GND_SIG2: C20.2 C24.2 C25.2 C26.2 C27.2 C28.2 C29.2 C30.2 C31.2 C32.2 C33.2 C46.2 C47.2 C48.2 Q2.3 R8.2 SICDIODE2.1 SICDIODE2.3 U3.6 U$2.13 X3.A1 X3.A2
GND_SIG3: C70.2 C71.2 C72.2 C73.2 C74.2 C75.2 C76.2 C77.2 C78.2 C79.2 C80.2 C92.2 C93.2 C94.2 Q4.3 R44.2 SICDIODE3.1 SICDIODE3.3 U4.6 U$1.13 X6.A1 X6.A2
GOFF: R3.1 R4.1 U$5.21
GOFF1: R29.1 R40.1 U$3.21
GOFF2: R36.1 R37.1 U$2.21
GOFF3: R53.1 R54.1 U$1.21
GON: R5.1 R6.1 U$5.20
GON1: R41.1 R42.1 U$3.20
GON2: R38.1 R39.1 U$2.20
GON3: R55.1 R56.1 U$1.20
IN+: DL3.C J1.4 R13.1 R33.1
IN+1: DL7.C J5.4 R19.1 R50.1
IN+_PIN: C13.1 R13.2 U$5.9
IN+_PIN1: C57.1 R19.2 U$3.9
IN+_PIN2: C40.1 R30.2 U$2.9
IN+_PIN3: C87.1 R47.2 U$1.9
IN-/DIAG1: DL5.C J5.5 R26.1 R47.1
IN-/DIAG2: DL1.C J1.5 R12.1 R30.1
IN-/DIAG2_PIN: C9.1 R12.2 U$5.8
IN-/DIAG2_PIN1: C60.1 R26.2 U$3.8
IN-/DIAG2_PIN2: C42.1 R33.2 U$2.8
IN-/DIAG2_PIN3: C89.1 R50.2 U$1.8
N$1: R1.1 U$5.24
N$2: DL1.A R11.1
N$3: DL2.A R14.1
N$4: D5.2 R10.2
N$5: D2.2 R22.2
N$6: D9.2 R43.2
N$7: D3.1 R2.2
N$8: D1.3 Q1.1 R2.1 R3.2 R4.2 R5.2 R6.2 R7.1 TP2.TP U$5.22
N$9: D11.1 R28.2
N$11: C6.1 IC1.1 MICROCONTROLLER_POWER1.2
N$12: D8.1 R35.2
N$13: R8.1 U$2.24
N$14: DL3.A R31.1
N$15: DL4.A R32.1
N$16: D4.1 R15-D.N.M.1
N$17: D12.3 Q3.1 R17.1 R28.1 R29.2 R40.2 R41.2 R42.2 TP7.TP U$3.22
N$18: D3.2 D4.2 D9-D.N.M.2
N$19: D6.1 R1-D.N.M.2.1
N$20: D6.2 D8.2 D9-D.N.M.2.2
N$21: C47.1 C48.1 D5.1 D9-D.N.M.1 Q1.2 R20.2 SICDIODE.2 TP1.TP X1.A1 X1.A2
N$22: DL5.A R24.1
N$23: DL6.A R25.1
N$24: C69.1 IC2.1 MICROCONTROLLER_POWER2.2
N$25: D13.2 R45.2
N$26: D16.1 R52.2
N$27: R44.1 U$1.24
N$28: C45.1 R20.1
N$29: DL7.A R48.1
N$30: DL8.A R49.1
N$31: D15.3 Q4.1 R46.1 R52.1 R53.2 R54.2 R55.2 R56.2 TP8.TP U$1.22
N$32: C46.1 R21.1
N$34: D9-D.N.M1.2 D10.2 D11.2
N$35: D10.1 R15-D.N.M1.1
N$36: D9-D.N.M.1.2 D14.2 D16.2
N$37: D14.1 R1-D.N.M.1.1
N$38: C93.1 C94.1 D9-D.N.M1.1 D9.1 Q3.2 R57.2 SICDIODE1.2 TP3.TP X4.A1 X4.A2
N$39: C91.1 R57.1
N$40: C92.1 R58.1
N$41: R15.1 U$3.24
N$82: D7.3 Q2.1 R23.1 R35.1 R36.2 R37.2 R38.2 R39.2 TP4.TP U$2.22
NONE: J2.1
NONE1: J6.1
SD: J1.2 R16.1
SD1: J5.2 R18.1
SD_PIN: C15.1 C41.1 J3.1 J4.1 R16.2 U$2.11 U$5.11
SD_PIN1: C59.1 C88.1 J7.1 J8.1 R18.2 U$1.11 U$3.11
SDI: J1.9 SJ2.2
SDI1: J5.9 SJ9.2
SDI2: SJ5.2 SJ7.2
SDI3: SJ8.2 SJ11.2
SDI_PIN: C23.1 J3.4 SJ2.1 U$5.3
SDI_PIN1: C56.1 J7.4 SJ9.1 U$3.3
SDI_PIN2: C39.1 SJ7.1 U$2.3
SDI_PIN3: C86.1 SJ11.1 U$1.3
SDO: J1.10 SJ1.1
SDO1: J5.10 SJ12.1
SDO_PIN: SJ5.1 U$5.2
SDO_PIN1: SJ8.1 U$3.2
SDO_PIN2: J4.4 SJ1.2 U$2.2
SDO_PIN3: J8.4 SJ12.2 U$1.2
SENSE: C12.1 TP5.TP U$5.16
SENSE1: C44.1 TP9.TP U$3.16
SENSE2: C24.1 TP6.TP U$2.16
SENSE3: C71.1 TP10.TP U$1.16
VCECLAMP: R9.2 R15-D.N.M.2 U$5.19
VCECLAMP1: R15-D.N.M1.2 R27.2 U$3.19
VCECLAMP2: R1-D.N.M.2.2 R34.2 U$2.19
VCECLAMP3: R1-D.N.M.1.2 R51.2 U$1.19
VDD: C4.1 C7.1 C36.1 C43.1 IC1.3 J1.8 J1.12 R11.2 R14.2 R31.2 R32.2 SJ3.2 SJ6.2 U2.1 U3.1 U$2.7 U$5.7
VDD1: C4.2 C5.2 C6.2 C7.2 C9.2 C13.2 C15.2 C19.2 C21.2 C22.2 C23.2 C34.2 C35.2 C36.2 C37.2 C38.2 C39.2 C40.2 C41.2 C42.2 C43.2 C51.2 C52.2 C53.1 C53.2 C54.2 C55.2 C56.2 C57.2 C59.2 C60.2 C68.1 C68.2 C69.2 C81.2 C82.2 C83.1 C83.2 C84.2 C85.2 C86.2 C87.2 C88.2 C89.2 C90.1 C90.2 IC1.2 IC1.4 IC2.2 IC2.3 IC2.4 J1.11 J5.8 J5.11 J5.12 MICROCONTROLLER_POWER1.1 MICROCONTROLLER_POWER2.1 R24.2 R25.2 R48.2 R49.2 SJ4.2 SJ10.2 U1.1 U1.2 U2.2 U3.2 U4.1 U4.2 U$1.1 U$1.7 U$1.12 U$2.1 U$2.12 U$3.1 U$3.7 U$3.12 U$5.1 U$5.12
VH: C2.1 C10.1 C18.1 D1.2 U2.7 U$5.17
VH1: C49.1 C65.1 C67.1 D12.2 U1.7 U$3.17
VH2: C29.1 C31.1 C32.1 D7.2 U3.7 U$2.17
VH3: C76.1 C78.1 C79.1 D15.2 U4.7 U$1.17
VL: C1.1 C3.1 C16.1 C17.1 D1.1 R7.2 R9.1 U2.5 U$5.14 U$5.23
VL1: C50.1 C63.1 C64.1 C66.1 D12.1 R17.2 R27.1 U1.5 U$3.14 U$3.23
VL2: C27.1 C28.1 C30.1 C33.1 D7.1 R23.2 R34.1 U3.5 U$2.14 U$2.23
VL3: C74.1 C75.1 C77.1 C80.1 D15.1 R46.2 R51.1 U4.5 U$1.14 U$1.23
VREG: C5.1 C19.1 C34.1 C35.1 SJ3.1 SJ6.1 U$2.6 U$5.6
VREG1: C51.1 C52.1 C81.1 C82.1 SJ4.1 SJ10.1 U$1.6 U$3.6
VREGISO: C11.1 C14.1 U$5.15
VREGISO1: C61.1 C62.1 U$3.15
VREGISO2: C25.1 C26.1 U$2.15
VREGISO3: C72.1 C73.1 U$1.15